# Altium PCB PCB.PcbDoc (part 4 of 5)
Units mil, origin at the board's own origin, x right, y up, seen from the top; angles counter-clockwise.
Board outline 7500 x 6500 mil, 2 copper layers (Top Layer, Bottom Layer); 229 components, 273 nets, 1476 pads, 506 vias.
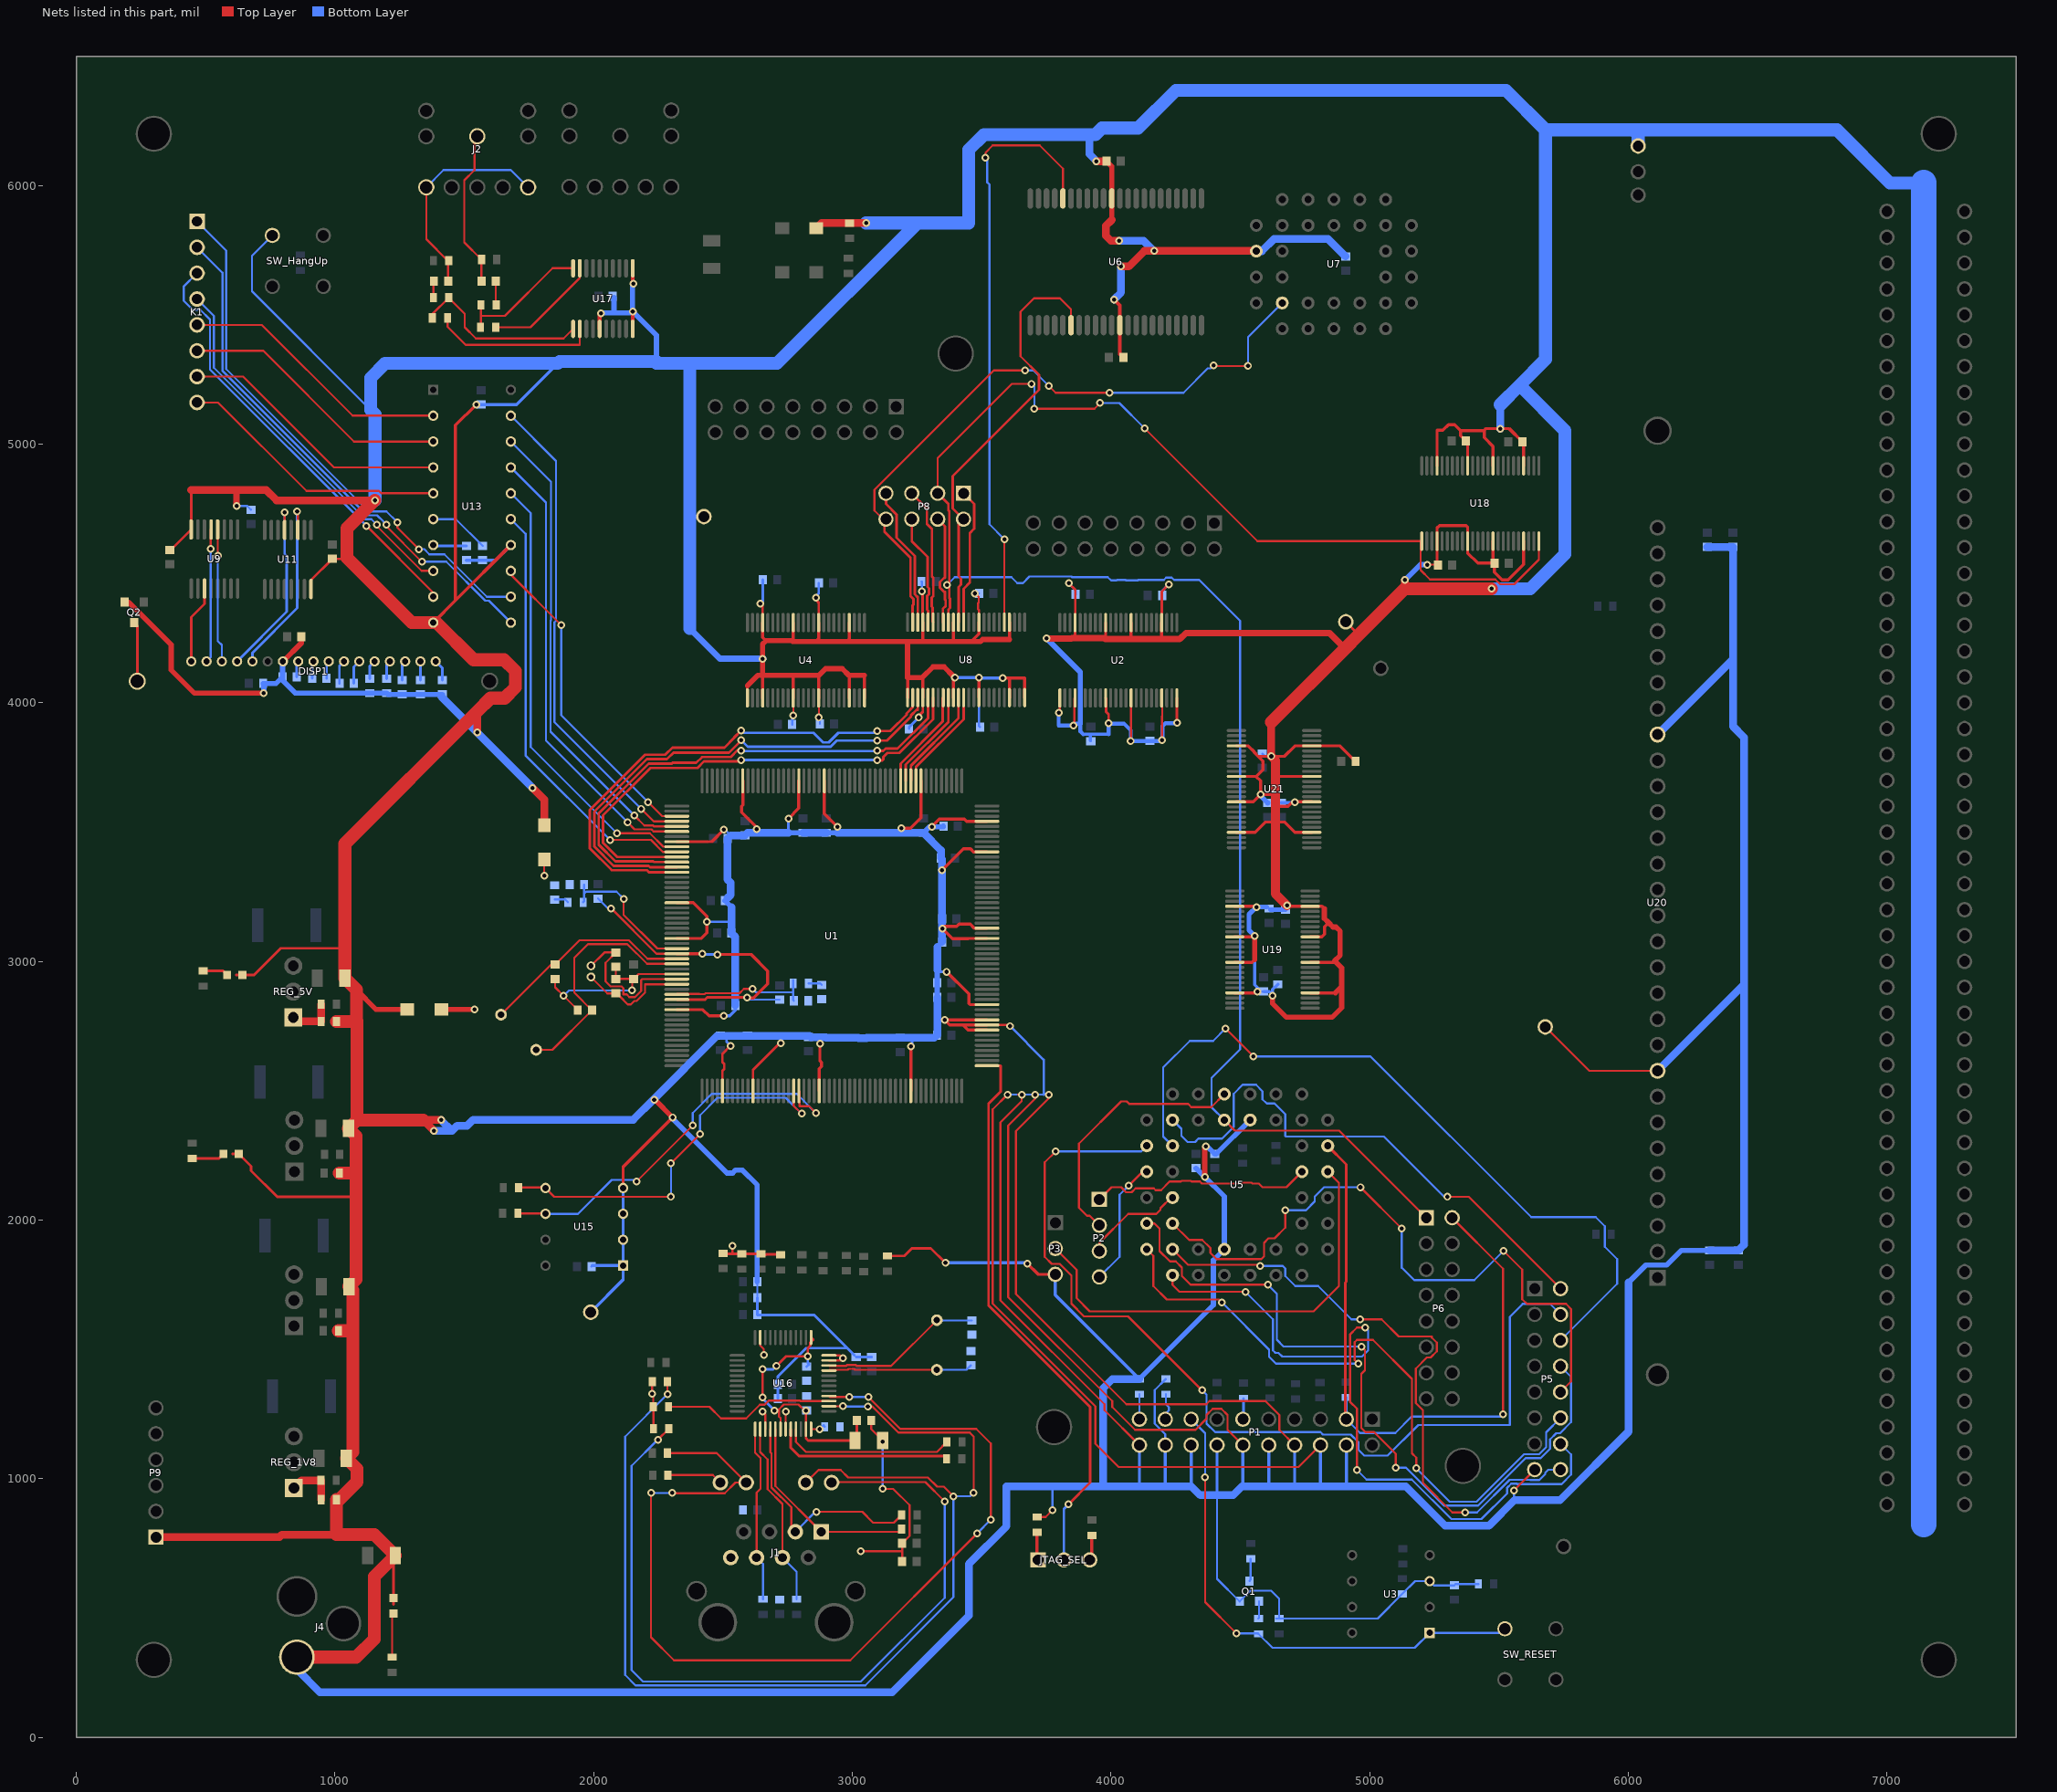
[diagram p4: the nets of this part, all layers, seen from the top]

## Via types
v1: diameter 30, hole 16, Top Layer to Bottom Layer, 500 vias
v2: diameter 30, hole 16, Top Layer to Bottom Layer, tented top, 6 vias

## Nets (pads, with @x,y where several pads share a name; then routed paths per layer and width w, separated by ;. In a path a pad name is that pad's centre, name@x,y a point inside that pad or via, vN(x,y) a via of type N, cw(c..) or ccw(c..) an arc to the next point about the centre after c; other vN are vias at no path point) (continued)
GND: C1.2 C2.2 C3.2 C4.2 C5.1 C6.2 C7.1 C8.2 C9.1 C10.2 C11.1 C12.2 C13.1 C14.2 C16.2 C18.2 C20.2 C21.2 C24.2 C25.2 C32.2 C33.2 C34.2 C35.2 C36.2 C37.2 C38.2 C39.2 C41.2 C43.2 C44.1 C45.1 C46.1 C47.1 C48.1 C49.2 C50.2 C51.2 C52.2 C53.2 C54.2 C55.2 C56.2 C57.2 C58.2 C59.2 C60.2 C61.2 C63.2 C65.2 C66.2 C67.2 C68.2 C69.2 C70.2 C71.1 C72.1 C74.1 C75.2 C76.1 C77.2 C78.1 C79.1 C80.2 C81.2 C82.2 C83.2 C84.2 C85.2 C86.2 C87.2 C88.2 C89.2 C90.2 C91.2 C92.2 C93.2 C94.2 C95.2 C96.2 C97.2 C98.2 C99.2 C100.2 C101.2 C102.2 C103.2 C104.2 C105.2 C106.2 C107.2 DISP1.11 J1.8 J4.GND L2.2 L3.2 L4.2 L5.K L6.K L7.K P1.4 P1.6 P1.8 P1.10 P1.12 P1.14 P1.16 P1.18 P1.20 P3.3 P5.15 P9.1 pad.GND_TEST_1 pad.GND_TEST_2 pad.GND_TEST_3 pad.GND_TEST_4 pad.GND_TEST_5 Q1.2 Q2.S R4.1 R6.2 R13.2 R14.2 R19.1 R20.1 R21.1 R35.2 R36.1 R37.1 R38.1 R39.2 R40.2 R48.1 R50.1 R52.1 R54.1 R64.1 R65.2 R66.2 SW_HangUp.2 U1.8 U1.20 U1.27 U1.41 U1.57 U1.63 U1.76 U1.94 U1.112 U1.113 U1.114 U1.117 U1.130 U1.132 U1.147 U1.153 U1.165 U1.184 U1.189 U1.200 U2.4 U2.10 U2.15 U2.21 U2.25 U2.28 U2.34 U2.39 U2.45 U2.48 U3.3 U4.4 U4.10 U4.15 U4.21 U4.25 U4.28 U4.34 U4.39 U4.45 U4.48 U5.1 U5.23 U6.12 U6.34 U7.16 U8.4 U8.10 U8.15 U8.21 U8.25 U8.28 U8.34 U8.39 U8.45 U8.48 U9.8 U11.8 U13.10 U13.14 U15.1 U15.2 U15.3 U15.4 U16.15 U16.19 U16.35 U16.36 U16.47 U17.1 U17.15 U17.20 U18.4 U18.10 U18.15 U18.21 U18.28 U18.34 U18.39 U18.45 U19.4 U19.10 U19.15 U19.21 U19.28 U19.34 U19.39 U19.45 U20.9 U20.22 U21.4 U21.10 U21.15 U21.21 U21.28 U21.34 U21.39 U21.45 | length 91126.1
  Top Layer w8: C10.2@362,4590.56 C10.2@364.82,4590.56 ; U11.8@907.57,4439.83 U11.8@907.57,4474.01 ; 1068,1572 1069,1573 ; 1078,2182 1082,2186 ; U15.4@2114,2124 U15.4@2115,2123 ; R20.1@2226.47,1376 v1(2226.47,1328.53) 2230.47,1324.53 R19.1@2230.47,1278 2231.47,1277 R21.1@2231.47,1193 ; R39.2@2501,1871.53 R39.2@2503,1869.53 ; v1@2529,2674 v1(2530,2674) ; U16.47@2643.89,1546 2643.89,1515.11 2658,1501 v1(2658,1479) ; v1(2644,4384) v1@2653.47,4374.53 ; R37.1@2647,1869.53 R37.1@2651,1865.53 ; v2(2653,1260) 2663.57,1249.43 U16.15@2663.57,1191.67 ; v1@2653,4171 v1(2653.47,4170.54) ; 2665.29,1865.53 2667.76,1868 ; v1@2719,2684 v1(2724,2684) ; R36.1@2720.53,1868 R36.1@2723,1865.53 ; U16.19@2742.31,1191.67 2742.31,1257.31 v2(2744,1259) ; 2770,4237 2771.58,4238.58 ; U4.34@2771.58,4018.66 2772,4018.24 v1(2772,3951) ; 2771.58,4105.58 2772,4106 ; U4.39@2870,4018.66 2871,4017.66 v1(2871,3943) ; 2870,4105 2871,4106 ; v1@2874.75,2680.75 v1(2876,2682) ; U16.35@2909.64,1457.42 2954.42,1457.42 v1(2963,1466) 2951.9,1477.1 U16.36@2909.64,1477.1 ; 2987,4106 2988.11,4104.89 ; v1(3032,720) 3192.97,720 ; 3047,4106 3047.17,4105.84 ; C63.2@3073.12,1226 3073.12,1192.03 C61.2@3117.15,1148 v1(3117.15,1142.85) ; v1@3114.75,958.45 v1(3117.15,960.85) 3158.15,960.85 3221.34,897.66 3221.34,778.37 C81.2@3192.97,750 3192.97,720 ; C86.2@3192.97,680 3192.97,720 ; 3213.78,4235.78 3215,4237 ; v1(3257,3943) v1@3257,3949 ; v1(3269,4431) v1@3272.22,4427.78 ; 3272,4237 3272.84,4237.84 ; v1(3308,3520) v1@3308,3522 ; v1@3390.95,4090.95 v1(3397,4097) v1@3391.11,4102.89 ; U8.15@3390.95,4311.34 U8.15@3393.44,4313.83 ; v1(3474,4423) 3488.43,4408.57 3488.43,4387.06 3486.35,4384.99 3486.35,4361.79 3489.37,4358.78 U8.10@3489.37,4311.34 ; U8.39@3489.37,4020 U8.39@3490,4020.63 ; v1(3600,2485) 3543,2428 3543,1677.16 3940,1280.16 3940,1135 4030,1045 4725,1045 P1.6@4810,1130 ; v1@3605.67,2754.33 v1(3610,2750) ; 3607,4096 3607.48,4095.52 ; v1@3641,2485 v1(3655,2485) 3655,2459.87 3573,2377.87 3573,1689.59 3975,1287.59 3975,1265 P1.20@4110,1130 ; 3666,4096 3666.54,4095.47 ; v1(3707,2485) 3707,2469.44 3603,2365.44 3603,1702.02 4005,1300.02 4005,1277.69 4093.21,1189.47 4326.79,1189.47 4369.47,1232.16 4369.47,1246.79 4393.21,1270.53 4426.79,1270.53 4450.53,1246.79 4450.53,1189.47 P1.12@4510,1130 ; R6.2@3714,852 3747,852 v1(3774,879) ; v1(3759,2485) 3759,2470 3633,2344 3633,1714.44 4059.44,1288 4368.26,1288 4380.79,1300.53 4596.79,1300.53 4650.53,1246.79 4650.53,1189.47 P1.8@4710,1130 ; v1(3798,3961) v1@3802.21,3965.21 ; v1(3855,3912) 3858.48,3915.48 3858.48,4015.88 U2.28@3861.26,4018.66 ; 3978,4246 3979.37,4247.37 ; v1(4076.44,3852.44) 4077.8,3853.8 U2.39@4077.8,4018.66 ; 4077.8,4246.21 4078,4246 ; U2.45@4195.91,4018.66 4198,4016.57 4198,3948.02 4197,3947.02 4197,3856 v1(4198,3855) ; v1@4254.96,3923.96 4255.92,3923 v1(4255,3923) ; 4550.78,3714.78 4551.21,3715.21 ; v1@4552,3095 v1(4556,3099) ; v1@4552.67,3210.33 4553,3210 v1(4562,3210) ; v1@4561.03,2878.47 v1(4566,2883.44) ; v1@4573,3646 v1(4578,3646) ; P1.10@4610,1130 P1.10@4610,1142 ; v1(4681,3216) v1@4683,3214 ; v1@4700.58,3615.58 v1(4710.43,3615.58) v1@4713.21,3612.8 ; v1(5223,4534) 5259.82,4534 5260.63,4534.81 C100.2@5263.44,4532 ; C50.2@5371.56,5012 C50.2@5378.74,5004.82 ; C14.2@5477.17,4545.27 C14.2@5482.44,4540 ; v1(5558,955) P5.15@5638,1035 ; C99.2@5590.56,5009 C99.2@5595.28,5004.28 ; pad.GND_TEST_3@5679,2747 5849,2577 U20.9@6113,2577
  Top Layer w10: C10.2@364.82,4590.56 U9.8@444.43,4670.17 ; L7.K@628,2256 676,2208 676,2191 777,2090 1082,2090 ; L6.K@642.06,2948 687,2948 790,3051 1038.15,3051 ; U11.8@907.57,4474.01 C16.2@990,4556.44 1041.44,4556.44 1046,4561 ; v1@1154.53,4783 v1(1155,4783) ; L5.K@1226,538 1226,695.85 C71.1@1233.15,703 ; U1.57@2497.95,2499.41 2497.95,2576.65 2505,2583.69 2505,2603.77 2497.95,2610.82 2497.95,2642.95 v1@2529,2674 ; R39.2@2503,1869.53 2537,1869.53 ; v1(2537,1900) 2537,1869.53 ; U4.25@2594.41,4018.66 2594.41,4065.58 ; U1.63@2616.06,2499.41 2616.06,2581.06 v1@2719,2684 ; v1(2631,3511) v1@2631,3517.94 ; R37.1@2647,1869.53 R38.1@2573,1869.53 2537,1869.53 ; R37.1@2651,1865.53 2665.29,1865.53 ; U4.21@2653.47,4310 v1@2653.47,4374.53 ; 2667.76,1868 R36.1@2720.53,1868 ; v1(2860,4406) 2860,4397 2870,4387 U4.10@2870,4310 ; R35.2@3136,1861.53 3201,1861.53 3230.47,1891 3304,1891 v1(3360,1835) ; v1@3257,3949 3272.84,3964.84 U8.28@3272.84,4020 ; v1@3272.22,4427.78 3272.22,4344.73 3272.84,4344.11 U8.21@3272.84,4311.34 ; U1.113@3520.59,2754.33 v1@3605.67,2754.33 ; v1@3802.21,3965.21 U2.25@3802.21,4018.66 ; v1(3837,4462) 3862,4437 3862,4310.74 U2.21@3861.26,4310 ; 3847.18,4249 3848.18,4250 3861.26,4263.08 ; U2.34@3979.37,4018.66 3981,4017.03 3981,3965 3991,3955 v1(3991,3921) ; U2.4@4195.91,4310 4195.91,4429.91 v1(4224,4458) ; v1@4254.96,3923.96 U2.48@4254.96,4018.66 ; pad.GND_TEST_2@4908,4313 4957.5,4263.5 4957.5,4262.5 ; 5441.37,5052 5443,5053.63
  Top Layer w12: U9.8@444.43,4670.17 444.43,4823 ; U13.10@1380,4310 1466,4396 ; v1(1546.44,5153.44) 1466,5073 1466,4396 ; U13.14@1680,4610 1466,4396 ; U15.4@2114,2124 2114,2206 v1(2305,2397) ; U1.41@2321.77,2813.39 2422.61,2813.39 2446,2790 v1(2503,2790) ; U1.27@2321.77,3088.98 2416.57,3088.98 2438,3110.4 v1(2438,3153) 2438,3174 2385.23,3226.77 U1.20@2321.77,3226.77 ; U1.8@2321.77,3462.99 2456.99,3462.99 v1(2503,3509) ; U1.200@2576.69,3698.23 2576.69,3604.87 2571.98,3600.15 2571.98,3576.96 v1@2631,3517.94 ; U4.28@2653.47,4018.66 2653.47,4106 ; U4.21@2653.47,4310 2653.47,4252.53 2666,4240 ; v1(2753,3552) 2793.23,3592.23 U1.189@2793.23,3698.23 ; U4.34@2771.58,4018.66 2771.58,4105.58 ; 2771.58,4238.58 U4.15@2771.58,4310 ; 2858,4237 2870,4249 U4.10@2870,4310 ; U4.39@2870,4018.66 2870,4105 ; U1.76@2871.97,2499.41 2871.97,2584.64 2881,2593.66 2881,2609.77 2874.75,2616.02 v1@2874.75,2680.75 ; U1.184@2891.65,3698.23 2891.65,3571.35 v1(2942,3521) ; 2977,4237 2988.11,4248.11 U4.4@2988.11,4310 ; U4.45@2988.11,4018.66 2988.11,4104.89 ; U4.48@3047.17,4018.66 3047.17,4105.84 ; v1(3190,3515) 3225,3515 3265.67,3555.67 U1.165@3265.67,3698.23 ; U8.25@3213.78,4020 3213.78,4097 ; U1.94@3226.3,2499.41 v1(3226.3,2671.3) ; 3269.78,4097 3272.84,4100.06 U8.28@3272.84,4020 ; 3272.84,4237.84 U8.21@3272.84,4311.34 ; v1@3308,3522 3336.05,3550.05 3433.95,3550.05 3442.27,3541.73 U1.153@3520.59,3541.73 ; v1(3346,3352) 3429,3435 3457,3435 3468.38,3423.62 U1.147@3520.59,3423.62 ; v1(3365,2960) 3451,2874 3451,2837.26 3455.19,2833.07 U1.117@3520.59,2833.07 ; 3387,4237 3390.95,4240.95 U8.15@3390.95,4311.34 ; U8.34@3390.95,4020 v1@3390.95,4090.95 ; 3459,4237 3489.37,4267.37 U8.10@3489.37,4311.34 ; U8.39@3490,4020.63 v1(3490,4097) ; U1.112@3520.59,2734.65 3447.35,2734.65 3427.67,2754.33 ; U1.113@3520.59,2754.33 3427.67,2754.33 ; U1.114@3520.59,2774.02 v1(3357.02,2774.02) 3376.7,2754.33 3427.67,2754.33 ; U1.130@3520.59,3088.98 3448.99,3088.98 3448.01,3088 3387,3088 v1(3348,3127) 3356,3135 3404,3135 3413,3144 3455.56,3144 3471.22,3128.35 U1.132@3520.59,3128.35 ; v1(3582,4096) 3607,4096 3666,4096 ; U8.45@3607.48,4020 3607.48,4095.52 ; 3607.48,4245 U8.4@3607.48,4311.34 ; U8.48@3666.54,4020 3666.54,4095.47 ; v1(3677,1832) 3719,1790 P3.3@3785,1790 ; 3861.26,4263.08 U2.21@3861.26,4310 ; 3979.37,4247.37 U2.15@3979.37,4310 ; 4077.8,4246.21 U2.10@4077.8,4310 ; U2.4@4195.91,4310 4195.91,4293.41 4196,4293.32 4196,4246 ; v1@4362.44,2281.44 v1(4366,2285) ; U19.45@4478.66,2878.47 v1@4561.03,2878.47 ; U19.39@4478.66,2996.58 4545.58,2996.58 4556,3007 ; U19.34@4478.66,3095 v1@4552,3095 ; U19.28@4478.66,3213.11 4558.89,3213.11 v1(4562,3210) ; U21.45@4485,3498.78 4557.78,3498.78 4598,3539 4636,3539 4670,3539 4710.22,3498.78 U21.4@4776.34,3498.78 ; U21.39@4485,3616.89 4485.11,3616.78 4550,3616.78 4550,3618 v1(4578,3646) ; U21.34@4485,3715.32 4485.11,3715.21 4551.21,3715.21 4560.98,3715.21 ; U21.28@4485,3833.43 4530.88,3833.43 4553,3811.3 4553,3809 4569.11,3792.89 ; 4636,3600 4685,3600 v1@4700.58,3615.58 ; 4636,3647 4635,3646 v1(4578,3646) ; 4636,3716 4636.68,3715.32 U21.15@4776.34,3715.32 ; v1@4683,3214 4683.89,3213.11 U19.21@4770,3213.11 4815.89,3213.11 4825,3204 ; v1(4710.43,3615.58) 4711.74,3616.89 U21.10@4776.34,3616.89 ; U19.4@4770,2878.47 4867.47,2878.47 ; U19.10@4770,2996.58 4858.58,2996.58 4864.5,3002.5 ; U19.15@4770,3095 4815,3095 4826,3106 4826,3134 4841.5,3149.5 ; C104.2@4945.56,3773 4885.13,3833.43 U21.21@4776.34,3833.43 4710.43,3833.43 4670,3793 v1(4620,3793) 4619.89,3792.89 4569.11,3792.89 ; C100.2@5260.63,4534.81 U18.28@5260.63,4625 5260.63,4676.63 5269.63,4685.63 5373.37,4685.63 5378.74,4680.26 U18.34@5378.74,4625 5378.74,4579.5 5418.24,4540 C14.2@5482.44,4540 5482.44,4504.51 5511.95,4475 5535.6,4475 5595.28,4534.68 U18.45@5595.28,4625 ; U18.21@5260.63,4916.34 5260.63,5053.63 5283.03,5053.63 5304.84,5075.44 5328.04,5075.44 5351.48,5052 ; C50.2@5371.56,5012 5351.48,5032.08 5351.48,5052 ; U18.15@5378.74,4916.34 C50.2@5378.74,5004.82 ; 5441.37,5052 5351.48,5052 ; C14.2@5477.17,4545.27 U18.39@5477.17,4625 ; U18.10@5477.17,4916.34 5477.17,4991.24 5443,5025.4 5443,5053.63 5449.37,5060 v1(5505,5060) 5539.56,5060 C99.2@5590.56,5009 ; U18.4@5595.28,4916.34 C99.2@5595.28,5004.28 ; 4560.98,3715.21 4578,3698.18 v1(4578,3646) ; 4560.98,3715.21 4587,3741.23 4587,3775 4569.11,3792.89
  Top Layer w15: U17.15@2023.18,5445.75 2023.18,5500.18 v1(2028,5505) ; U17.20@2151.13,5445.75 v1(2151.13,5512.87) ; v1@2151.13,5623.87 U17.1@2151.13,5680 ; 3974,4250 3978,4246 ; v1(4012,5559) 4034.5,5536.5 U6.12@4034.5,5460 4034.5,5348.06 C24.2@4047.56,5335
  Top Layer w20: Q2.S@186.6,4388.74 202.77,4388.74 367,4224.51 367,4127 457,4037 v1(725,4037) ; DISP1.11@798.94,4160 870.56,4231.62 C79.1@870.56,4256 ; 1083,2890.15 1158.15,2815 L4.2@1279.06,2815 ; v1@2151.13,5623.87 v1(2154,5621) ; v1(2234.07,2465) 2237,2465 v1(2305,2397) ; 2594.41,4065.58 2634.83,4106 2653.47,4106 ; v1@2653,4171 2653,4227 2666,4240 2767,4240 2770,4237 2858,4237 2977,4237 3212.56,4237 3213.78,4235.78 3213.78,4097 3269.78,4097 ; v1(2653.47,4170.54) 2653.47,4106 ; 3047,4106 2987,4106 2961,4132 2897,4132 2871,4106 2772,4106 2653.47,4106 ; 3215,4237 3272,4237 3387,4237 3459,4237 3496,4237 3504,4245 3607.48,4245 ; 3272.84,4100.06 3311.78,4139 3355,4139 v1@3391.11,4102.89 ; C3.2@3982.44,6094 4003,6073.44 U6.34@4003,5950.08 4003,5867 ; v1(4362.44,2167) v1@4362.44,2281.44 ; U7.16@4551,5747 4556,5752 U7.16@4562,5746 ; 4556,3007 v1(4556,3099) ; v1(4625,2867) 4625,2837 4678,2784 4855,2784 4892,2821 4892,2903 ; 4825,3204 4825,3166 4841.5,3149.5 4858,3133 4869.6,3133 4886,3116.6 4886,3024 4864.5,3002.5 4892,2975 4892,2903 ; 4867.47,2878.47 4892,2903 ; 5137,4442 5138,4441
  Top Layer w25: v1(620,4761) 620,4821 622,4823 ; v1(3751,4249) 3847.18,4249 ; 3848.18,4250 3974,4250 ; 3978,4246 4078,4246 4196,4246 4266,4246 4290,4270 4845,4270 4905,4210
  Top Layer w30: P9.1@308,774 785.3,774 794.77,783.47 1005.53,783.47 ; 444.43,4823 622,4823 734.23,4823 774.23,4783 v1@1154.53,4783 ; R48.1@1005.53,919 R48.1@1016,919 ; C78.1@1054.15,1743 C78.1@1069,1728.15 ; U13.10@1380,4310 U13.10@1392,4310 ; v1(1383,2345) 1341.15,2386.85 v1(1410.48,2386.85) ; v1(1549.5,3885.5) 1549.5,3966.5 ; v1(1764,3671) 1809,3626 L3.2@1809,3525.94 ; L2.2@2860.94,5835 2880.47,5854.53 R64.1@2990,5854.53 3052.53,5854.53 v1(3053,5855) ; v1(3944,6094) C3.2@3982.44,6094 ; 4003,5867 3980,5844 3980,5806 4000,5786 v1(4031,5786) ; v1(4039,5687) 4069.18,5687 4129.18,5747 v1(4167,5747) U7.16@4551,5747 ; v1(4620,3793) 4620,3925 ; 5137,4442 v1(5137,4475)
  Top Layer w35: v1(4620,3793) 4636,3777 4636,3716 4636,3647 4636,3600 4636,3539 4636,3261 v1(4681,3216)
  Top Layer w50: J4.GND@853,310 1082,310 1151.68,379.68 1151.68,621.53 C71.1@1226,695.85 ; R48.1@1005.53,919 1005.53,783.47 1152.68,783.47 C71.1@1233.15,703 ; R50.1@1005.53,2768 1083,2768 1083,2890.15 C74.1@1038.15,2935 1038.15,3051 1038.15,3455.15 1549.5,3966.5 1601.23,4018.23 1656.23,4018.23 1697,4059 1697,4123 1654,4166 1536,4166 U13.10@1392,4310 ; R54.1@1013.53,1572 1068,1572 ; R48.1@1016,919 1085,988 1085,1038.15 C72.1@1044.15,1079 1069,1103.85 1069,1573 C78.1@1069,1728.15 ; R52.1@1017.53,2182 1078,2182 ; C78.1@1054.15,1743 1082,1770.85 1082,2090 1082,2186 1082,2324.15 C76.1@1052.15,2354 1085,2386.85 ; 1085,2770 1085,2386.85 ; v1@1154.53,4783 1046,4674.47 1046,4561 1297,4310 U13.10@1380,4310 ; 1341.15,2386.85 1085,2386.85 ; 4620,3925 4905,4210 4957.5,4262.5 5137,4442 ; 5138,4441 v1(5471,4441)
  Bottom Layer w8: C54.2@660.56,4761 C54.2@675,4746.56 ; SW_HangUp.2@758.15,5806.85 679,5727.7 679,5591 1138,5132 ; C2.2@1991.56,1820 C2.2@1995.56,1824 ; v1(2028,5505) v1@2030,5507 ; C1.2@2073.56,5572 C1.2@2079,5566.56 ; v1@2150,5507 2150,5514 v1(2151.13,5512.87) ; v1(2438,3153) 2532.56,3153 ; v1(2503,3509) 2508.44,3509 2530,3487.44 C68.2@2517.56,3475 ; C88.2@2632.56,1700 C91.2@2632.56,1762 ; v1(2644,4384) 2647,4384 v1@2654.44,4391.44 ; v1(2653.47,4170.54) 2654,4170 2654,4170.44 v1@2653.47,4170.98 ; v1(2724,2684) 2724,2689 2727,2692 2727,2712.56 ; 2753,3498.44 2754,3497.44 ; C55.2@2767.56,3916 2767.56,3946.56 v1(2772,3951) ; v1(2871,3943) 2874.44,3939.56 C35.2@2874.44,3919 ; 2875,2707.56 2876,2706.56 v1(2876,2682) ; 2942,3497.44 v1(2942,3521) ; v1(3117.15,960.85) v1(3117.15,1142.85) ; v1(3190,3515) 3190,3511.44 3204,3497.44 ; C6.2@3219.44,3899 C6.2@3219.44,3905.44 ; v1(3226.3,2671.3) v1@3231,2676 ; C94.2@3267.44,4469 C94.2@3269,4467.44 ; 3328.44,2776 3330.43,2774.02 v1(3357.02,2774.02) ; 3328.44,2966 3334.44,2960 ; v1(3474,4423) C80.2@3490,4423 ; v1@3491,4096 v1(3490,4097) 3490,3910.44 C95.2@3494.44,3906 ; v1(3600,2485) v1(3655,2485) v1(3707,2485) 3740,2485 3743,2488 3759,2488 v1(3759,2485) ; v1@3674,1835 v1(3677,1832) ; v1(3774,879) 3774,970 3775,971 ; v1(3855,3912) v1@3862.56,3919.56 ; C97.2@3863.44,4419 C97.2@3863.44,4435.56 ; C38.2@3921,3852.88 C38.2@3922,3851.88 ; v1@3991,3919.56 v1(3991,3921) ; 4109,971 4110,972 ; v1@4195.44,3852.44 v1(4198,3855) v1@4199.56,3856.56 ; C96.2@4197.56,4415 C96.2@4197.56,4431.56 ; P1.18@4210,1130 4210,1172.69 4169.47,1213.21 4169.47,1343 R13.2@4212,1385.53 ; v1@4255,3921 v1(4255,3923) ; C56.2@4401,2255.56 C56.2@4406.56,2255.56 ; 4410,936 4410,613.23 Q1.2@4497.6,525.63 4538.97,567 4619,567 4650,536 R66.2@4650,459.53 ; 4507,971 4510,974 ; v1(4566,2883.44) C106.2@4590,2883.44 ; v1@4578,3641 v1(4578,3646) ; C103.2@4585,3803.56 4595.56,3793 v1(4620,3793) ; C105.2@4602.56,3210 4604.56,3212 C105.2@4612,3204.56 C105.2@4616.56,3200 ; 4607,971 4610,974 ; R66.2@4637.53,459.53 R66.2@4650,459.53 ; C33.2@4663,3212 C33.2@4675,3200 4681,3206 v1(4681,3216) ; v1@4708.41,3613.56 v1(4710.43,3615.58) ; 4709,971 4710,972 ; 4908,971 4910,973 ; R65.2@5420.47,593 5332.44,593 C32.2@5327,587.56 5248.44,587.56 U3.3@5232,604 5175.53,604 R4.1@5126,554.47 5031.06,459.53 R66.2@4650,459.53 ; v1(5558,955) 5558,921 5561,918
  Bottom Layer w10: v1(620,4761) C54.2@660.56,4761 ; DISP1.11@797.44,4158.5 DISP1.11@798.94,4160 ; 2373,4720 pad.GND_TEST_1@2426,4720 ; 2514,2712.56 2514,2690 v1(2530,2674) ; v1(2631,3511) v1@2635,3507 ; C87.2@2632.56,1632.44 2852.56,1632.44 2980,1505 ; C87.2@2632.56,1635 C88.2@2632.56,1700 ; v1@2654.44,4391.44 C20.2@2654.44,4476 ; C90.2@2712.44,1310 C89.2@2712.44,1365 2712.44,1395.62 2821.82,1505 2980,1505 ; 2753,3498.44 v1(2753,3552) ; v1(2860,4406) 2860,4413 2870.44,4423.44 C58.2@2870.44,4463 ; C93.2@3007.9,1477.1 2980,1505 ; C93.2@3015,1470 C92.2@3075,1470 ; C6.2@3219.44,3905.44 v1(3257,3943) ; v1@3231,2676 3231,2705 ; v1(3269,4431) C94.2@3269,4467.44 ; 3334.44,2960 v1(3365,2960) ; v1(3610,2750) 3740,2620 3740,2485 ; v1(3837,4462) C97.2@3863.44,4435.56 ; C96.2@4197.56,4431.56 v1(4224,4458)
  Bottom Layer w12: C41.2@1508,4551.44 C43.2@1571,4551.44 1621.44,4551.44 U13.14@1680,4610 ; v1(1546.44,5153.44) C21.2@1566,5153.44 1702.44,5153.44 1861,5312 1869,5320 ; pad.GND_TEST_4@1989,1644 2114,1769 U15.1@2114,1824 ; C2.2@1995.56,1824 U15.1@2114,1824 ; U15.4@2114,2124 U15.3@2114,2024 U15.2@2114,1924 U15.1@2114,1824 ; v1(2503,2790) 2526,2790 2547.56,2811.56 C67.2@2547.56,2830 ; v1(3360,1835) v1@3674,1835 ; v1(3397,4097) v1(3490,4097) ; v1@3491,4096 v1(3582,4096) ; P3.3@3785,1790 3785,1710.53 R14.2@4110,1385.53 ; 3893,3878 3921,3878 ; C38.2@3921,3852.88 3921,3878 ; 3991,3878 3921,3878 ; 4110,972 P1.20@4110,1130 ; 4210,971 P1.18@4210,1130 ; 4310,971 P1.16@4310,1130 ; 4410,936 P1.14@4410,1130 ; 4510,974 P1.12@4510,1130 ; v1(4556,3099) 4556,2909 4566,2899 v1(4566,2883.44) ; C106.2@4590,2883.44 4612.56,2883.44 v1@4625,2871 ; 4610,974 P1.10@4610,1130 ; v1(4625,2867) v1@4625,2871 ; C107.2@4645,2911.44 4625,2891.44 v1@4625,2871 ; C18.2@4658,3613.56 v1@4708.41,3613.56 ; 4710,972 P1.8@4710,1130 ; 4810,971 P1.6@4810,1130 ; 4910,973 P1.4@4910,1130
  Bottom Layer w15: v1(3798,3961) 3798,3912 v1(3855,3912) ; v1@3862.56,3919.56 3881.44,3919.56 3881.44,3889.56 3893,3878 ; 3991,3878 v1@3991,3916 ; v1@3991,3919.56 4050.44,3919.56 4076.44,3893.56 v1(4076.44,3852.44) C98.2@4150,3852.44 v1@4195.44,3852.44 ; v1@4199.56,3856.56 4199.56,3909.56 4211,3921 v1@4255,3921
  Bottom Layer w18: v1(4556,3099) 4534,3121 4534,3182 v1(4562,3210) C105.2@4602.56,3210 ; C105.2@4616.56,3200 C33.2@4675,3200
  Bottom Layer w20: v1(725,4037) 725,4072.56 C53.2@722.56,4075 772.44,4075 C39.2@797.44,4100 ; DISP1.11@797.44,4158.5 C39.2@797.44,4100 ; C44.1@1415,4020 C44.1@1415,4032.44 C45.1@1330,4032.44 C46.1@1260,4032.44 1205,4032.44 C47.1@1200,4037.44 C48.1@1135,4037.44 846.56,4037.44 797.44,4086.56 C39.2@797.44,4100 ; v1@2030,5507 2079,5507 ; C1.2@2079,5566.56 2079,5507 ; v1@2150,5507 2079,5507 ; v1@2150,5514 2150,5617 v1(2154,5621) ; v1(2151.13,5512.87) 2243,5421 2243,5320 ; v1@2229,2470 2232,2467 2234,2465 v1(2234.07,2465) ; v1(2305,2397) 2305,2392.75 2515.75,2182 2537.75,2182 2548.75,2193 2575.25,2193 2632.56,2135.7 C91.2@2632.56,1762 ; C51.2@2477.56,2712.56 C51.2@2490,2712.56 ; C5.1@2517.56,3245 C5.1@2507.56,3235 2532.56,3210 ; C69.2@2585,3487.44 C69.2@2595,3497.44 ; 2754,3497.44 C9.1@2810,3497.44 ; C70.2@2900,3497.44 2942,3497.44 ; C49.2@3275,3497.44 3297.37,3519.81 3352.44,3519.81 C7.1@3352.44,3523 ; C34.2@3317.44,2705 C34.2@3327.44,2715 C34.2@3328.44,2716 ; C11.1@3328.44,2861 C37.2@3328.44,2917 3328.44,2966 ; 3328.44,3056 C4.2@3347.44,3075 ; C8.2@3342.44,3400 C8.2@3347.44,3395 ; v1(3751,4249) 3881.44,4118.56 3881.44,3919.56 ; R14.2@4110,1385.53 4396,1671.53 4396,1845 U5.1@4438,1887 4438,2091.44 v1(4362.44,2167) C57.2@4329,2200.44 ; v1@4166,5747 v1(4167,5747) ; v1(4366,2285) 4371.56,2285 C56.2@4401,2255.56 ; C56.2@4406.56,2255.56 U5.23@4538,2387 ; v1@4578,3641 C102.2@4606,3613 ; v1(5137,4475) 5196,4534 v1(5223,4534) ; 6001,1759 6068,1826 6148.37,1826 6204.93,1882.56 C84.2@6315,1882.56
  Bottom Layer w25: 2372,4287 2488.46,4170.54 v1(2653.47,4170.54)
  Bottom Layer w30: J4.GND@853,310 853,263 941,175 3155,175 3450,470 3450,670 3596,816 3596,971 3775,971 3970,971 ; v1(1383,2345) 1452.33,2345 ; v1(1410.48,2386.85) 1452.33,2345 ; C44.1@1415,4020 v1(1549.5,3885.5) v1(1764,3671) ; C51.2@2477.56,2712.56 2232,2467 2152.99,2387.99 1534.31,2387.99 1511.33,2365 1472.33,2365 1452.33,2345 ; C51.2@2490,2712.56 2514,2712.56 C13.1@2595,2712.56 2727,2712.56 2835,2712.56 2840,2707.56 2875,2707.56 2899,2707.56 ; C5.1@2517.56,3245 2530,3257.44 2530,3304.33 2517.56,3316.77 C68.2@2517.56,3475 ; C68.2@2530,3487.44 C69.2@2585,3487.44 ; 2532.56,3155.71 2532.56,3153 C52.2@2532.56,3110 2547.56,3095 C67.2@2547.56,2830 ; 2532.56,3156.68 2532.56,3210 ; C69.2@2595,3497.44 2754,3497.44 ; v1@2653.22,4170.78 v1(2653.47,4170.54) v1@2653.47,4170.98 ; C9.1@2810,3497.44 C70.2@2900,3497.44 ; 2899,2705 3023.67,2705 3024.67,2704 3055.33,2704 3056.33,2705 C25.2@3185,2705 3231,2705 C34.2@3317.44,2705 ; 2942,3497.44 3204,3497.44 C49.2@3275,3497.44 3342.44,3430 C8.2@3342.44,3400 ; C34.2@3328.44,2716 3328.44,2776 C11.1@3328.44,2861 ; 3328.44,2966 3328.44,3056 ; C4.2@3347.44,3075 C36.2@3347.44,3165 C8.2@3347.44,3395 ; 3916,6197 3916,6122 v1(3944,6094) ; v1(4012,5559) 4039,5586 v1(4039,5687) ; v1(4031,5786) 4127,5786 v1@4166,5747 ; R14.2@4110,1385.53 4005.53,1385.53 3970,1350 3970,971 ; U7.16@4562,5746 4583,5746 4630,5793 4840,5793 C12.2@4907,5726 ; v1(5505,5060) 5505,5153 ; 6001,1759 6001,1182 5737,918 5561,918 5461,818 5292,818 5139,971 4908,971 4810,971 4709,971 4607,971 4507,971 4472,936 4410,936 4345,936 4310,971 4210,971 4109,971 3970,971 ; U20.9@6113,2577 6447,2911 ; U20.22@6113,3877 6405,4169 ; C83.2@6305,4602.44 C75.2@6405,4602.44 6405,4169 ; C84.2@6315,1882.56 C77.2@6425,1882.56 6447,1904.56 6447,2911 ; 6405,4169 6405,3908.33 6447,3866.33 6447,2911
  Bottom Layer w50: v1(1155,4783) 1155,5115 1138,5132 1138,5256.33 1193.67,5312 1861,5312 ; 1869,5320 2243,5320 ; 2243,5312 2372,5312 ; 2372,4287 2372,4719 ; 2373,4720 2372,4719 ; v1(3053,5855) 3252,5855 ; v1(5471,4441) 5621,4441 5755,4575 5755,5052 5579.5,5227.5 ; 5505,5153 5579.5,5227.5 ; pad.GND_TEST_5@6038,6153 6038,6197 6020,6215 ; 7142,6010 7011,6010 6806,6215 6020,6215 ; 2372,4719 2372,5312 ; 2372,5312 2709,5312 3252,5855 ; 3252,5855 3450,5855 3450,6138 3509,6197 3916,6197 3940,6197 3965,6222 4105,6222 4251,6368 5527,6368 5680,6215 ; 5579.5,5227.5 5680,5328 5680,6215 ; 5680,6215 6020,6215
  Bottom Layer w100: 7142,823 7142,6010
GNDOSC: C19.1 C23.2 C27.2 C28.2 C30.2 L4.1 U1.34 | length 898.1
  Top Layer w8: C27.2@1851,2932.44 1851,2900 v1(1884,2867) 1938.44,2812.56 C23.2@1938.44,2811 ; C30.2@2086,2979.44 C28.2@2086,2931.56 2086.88,2932.44 C19.1@2155,2932.44 ; v1(2149,2888) 2149,2926.44 C19.1@2155,2932.44 ; U1.34@2321.77,2951.18 2173.74,2951.18 C19.1@2155,2932.44
  Top Layer w20: L4.1@1410.94,2815 v1(1539,2815)
  Bottom Layer w8: v1(1884,2867) 1905,2888 v1(2149,2888)
GNDPLL: C15.1 C17.1 C22.2 C26.2 C29.2 C31.2 L3.1 U1.30 U1.39 | length 1391.3
  Top Layer w8: v1(1809,3332) L3.1@1809,3394.06 ; v1(2068,3205) 2243.08,3029.92 U1.30@2321.77,3029.92 U1.30@2321.85,3030
  Top Layer w10: U1.39@2321.77,2852.76 2430.85,2852.76 2439.09,2861 v1(2594,2861)
  Top Layer w12: U1.30@2321.85,3030 v1(2420,3030) ; v1(2479,3027) 2609,3027 2673,2963 2673,2913.4 2618.67,2859.07 v1@2592.07,2859.07
  Bottom Layer w8: C15.1@2017,3243 2055,3205 v1(2068,3205) ; v1(2594,2861) 2602.56,2852.44 C17.1@2719,2852.44
  Bottom Layer w12: v1(2420,3030) 2423,3027 v1(2479,3027)
JTAG_NRST: P1.15 R67.1 SW_RESET.2 U3.1 | length 1992.5
  Top Layer w8: v1(4364,1005) 4364,523 v1(4485,402)
  Bottom Layer w8: P1.15@4310,1230 4364,1176 v1(4364,1005) ; v1(4485,402) 4568.47,402 R67.1@4570,400.47 4624.47,346 5174,346 U3.1@5232,404 5507.15,404 SW_RESET.2@5523.15,420
JTAG_NTRST: P1.3 P6.2 R12.1 U5.15 | length 2674
  Top Layer w8: P6.2@5319,2009 5516,1812 v1(5516,1249)
  Top Layer w10: U5.15@4838,2287 4910,2215 4910,1761.18 4906,1757.18 4906,1234 P1.3@4910,1230
  Bottom Layer w8: P1.3@4910,1230 4963,1177 5099,1177 5162,1240 5507,1240 v1(5516,1249)
  Bottom Layer w10: P1.3@4910,1230 R12.1@4910,1314.47
KEYPAD_D0: U1.4 U13.19 | length 1891.8
  Top Layer w8: v1(2184,3590) 2232.26,3541.73 U1.4@2321.77,3541.73
  Bottom Layer w8: U13.19@1680,5110 1854.94,4935.06 1854.94,4317.45 1848.63,4311.14 1848.63,3925.37 v1(2184,3590)
KEYPAD_D1: U1.5 U13.18 | length 1826.7
  Top Layer w8: v1(2157.84,3563.84) 2195.76,3525.91 2229.36,3525.91 2233.23,3522.05 U1.5@2321.77,3522.05
  Bottom Layer w8: U13.18@1680,5010 1835.26,4854.74 1835.26,4318.98 1833.63,4317.35 1833.63,3888.04 v1(2157.84,3563.84)
KEYPAD_D2: U1.6 U13.17 | length 1764.1
  Top Layer w8: v1(2131.67,3537.67) 2158.43,3510.91 2223.15,3510.91 2231.7,3502.36 U1.6@2321.77,3502.36
  Bottom Layer w8: U13.17@1680,4910 1815.57,4774.43 1815.57,3853.77 v1(2131.67,3537.67)
KEYPAD_D3: U1.9 U13.16 | length 1737.5
  Top Layer w8: v1(2089.91,3495.91) 2216.94,3495.91 2269.54,3443.31 U1.9@2321.77,3443.31
  Bottom Layer w8: U13.16@1680,4810 1756.52,4733.48 1756.52,3829.31 v1(2089.91,3495.91)
KEYPAD_D4: U1.10 U13.15 | length 1676.3
  Top Layer w8: v1(2063.75,3469.75) 2221.89,3469.75 2268.02,3423.62 U1.10@2321.77,3423.62
  Bottom Layer w8: U13.15@1680,4710 1736.83,4653.17 1736.83,3796.67 v1(2063.75,3469.75)
KEYPAD_RDY: U1.3 U13.13 | length 1247.7
  Top Layer w8: U13.13@1680,4510 1680,4495 v1(1874.63,4300.37) ; v1(2210.16,3616.16) 2264.9,3561.42 U1.3@2321.77,3561.42
  Bottom Layer w8: v1(1874.63,4300.37) 1874.63,3951.69 v1(2210.16,3616.16)
MICIN+: C62.1 J2.A J2.D R24.1 | length 850
  Top Layer w8: J2.D@1353.15,5993.15 1353.15,5792.44 R24.1@1437.56,5708.03 ; C62.1@1437.56,5630 R24.1@1437.56,5708.03 ; R24.1@1439.53,5710 R24.1@1437.56,5708.03
  Bottom Layer w8: J2.D@1353.15,5993.15 1420,6060 1680,6060 J2.A@1746.85,5993.15
MICIN-: C64.1 J2.E R33.2 | length 608.3
  Top Layer w8: J2.E@1550,6190 1540,6180 1540,6060 1500,6020 1500,5780.47 R33.2@1566.47,5714 C64.1@1566.47,5630.03
NBS1_3V3_BUF: U6.40 U8.5 | length 2308.7
  Top Layer w8: v1(3515,6107) 3515,6127.21 3542.79,6155 3724,6155 3814.02,6064.98 U6.40@3814.02,5950.08 ; U8.5@3587.8,4311.34 v1(3587.8,4632.2)
  Bottom Layer w8: v1(3515,6107) 3521,6101 3521,6013.23 3530,6004.23 3530,4690 v1(3587.8,4632.2)
NCS0: U1.166 U8.36 | length 398.1
  Top Layer w10: U1.166@3245.98,3698.23 3245.98,3751.98 3430.32,3936.31 U8.36@3430.32,4020
NCS1: U1.167 U8.35 | length 399.1
  Top Layer w8: 3409.02,3939.06 3410.63,3940.67 U8.35@3410.63,4020
  Top Layer w10: U1.167@3226.3,3698.23 3228.08,3700.01 3228.08,3745.85 3226.91,3747.01 3226.91,3756.96 3409.02,3939.06
NCS2: U1.168 U8.33 | length 390
  Top Layer w10: U1.168@3206.61,3698.23 3206.61,3760.7 3371.26,3925.34 U8.33@3371.26,4020
NCS3: U1.169 U8.32 | length 390
  Top Layer w10: U1.169@3186.93,3698.23 3186.93,3765.06 3349.8,3927.92 3349.8,4018.22 U8.32@3351.58,4020
NCS3V3B0: P8.1 U8.13 | length 533.2
  Top Layer w10: P8.1@3430,4810 3471.53,4768.47 3471.53,4673 3454.46,4655.94 3454.46,4465.69 3430,4441.23 3430,4311.65 U8.13@3430.32,4311.34
NCS3V3B1: P8.2 U6.6 U8.14 | length 1698.1
  Top Layer w8: 3722,5268 3650,5340 3650,5512 3702,5564 3803,5564 3845.52,5521.48 U6.6@3845.52,5460
  Top Layer w10: U8.14@3410.63,4311.34 3410.63,4447.57 3420.44,4457.38 3420.44,4479.74 3410.63,4489.55 3410.63,4690.63 P8.2@3430,4710 3388.47,4751.53 3388.47,4876.66 3722,5210.18 3722,5268
NCS3V3B2: P6.1 P8.3 U5.25 U8.16 U18.25 U18.48 | length 7852.6
  Top Layer w8: P8.3@3330,4810 3330,4946 3617,5233 v1(3693,5233) ; v1(3704,5137) 3936,5137 v1(3958,5159) ; v1(4130,5061) 4566,4625 U18.25@5201.58,4625 5197,4620.42 5197,4513 5233,4477 5485.91,4477 5504.91,4458 5559,4458 5654.33,4553.33 U18.48@5654.33,4625 ; U5.25@4438,2387 4479,2346 4882,2346 P6.1@5219,2009
  Top Layer w10: P8.3@3330,4810 3371.47,4768.53 3371.47,4744.49 3375,4740.96 3375,4406.23 3378,4403.23 3378,4366.77 3371.26,4360.03 U8.16@3371.26,4311.34
  Bottom Layer w8: v1(3366,4456) 3396,4486 3615.23,4486 3638.23,4463 3659.77,4463 3684.77,4488 3847.77,4488 3849.77,4486 3987.79,4486 4000.44,4473.34 4021.98,4473.34 4023.64,4475 4056.36,4475 4058.02,4473.34 4104.41,4473.34 4106.07,4475 4204.23,4475 4213.23,4484 4234.77,4484 4243.77,4475 4341,4475 4499,4317 4499,2660 4389,2550 4389,2436 U5.25@4438,2387 ; v1(3693,5233) 3704,5222 v1(3704,5137) ; v1(3958,5159) 4032,5159 v1(4130,5061)
NCS3V3B3: P8.4 U8.17 | length 436.2
  Top Layer w10: P8.4@3330,4710 3358,4682 3358,4483 3354.82,4483 3339,4467.18 3339,4444.82 3354.82,4429 3358,4429 3358,4399.18 3361,4396.18 3361,4373.82 3350,4362.82 3350,4312.91 U8.17@3351.58,4311.34
NCS3V3B4: P8.5 U8.19 | length 537.7
  Top Layer w10: P8.5@3230,4810 3288.47,4751.53 3288.47,4691.27 3308,4671.74 3308,4487.96 3313,4482.96 3313,4412.77 3307,4406.77 3307,4371.82 3310.43,4368.39 3310.43,4313.12 U8.19@3312.21,4311.34
NCS3V3B5: P8.6 U8.20 | length 430.2
  Top Layer w10: P8.6@3230,4710 3230,4625 3290.74,4564.26 3290.74,4447.44 3296,4442.18 3296,4419.82 3289.22,4413.04 3289.22,4359.78 3292.52,4356.48 U8.20@3292.52,4311.34
NCS3V3B6: P8.7 U8.22 | length 549.7
  Top Layer w10: P8.7@3130,4810 3130,4768.73 3171.53,4727.2 3171.53,4638.47 3242,4568 3242,4419.23 3253.15,4408.08 U8.22@3253.15,4311.34
NCS3V3B7: P8.8 U7.22 U8.23 | length 2599.7
  Top Layer w8: P8.8@3130,4710 3124.53,4704.53 3086,4743.06 3086,4824 3547,5285 v1(3668,5285) ; v1(3760,5225) 3786,5199 v1(3994,5199) ; v1(4396,5304) 4396,5303 4395,5302 v1(4530,5302)
  Top Layer w10: P8.8@3124.53,4704.53 3124.53,4661.43 3225,4560.96 3225,4412.18 3236,4401.18 3236,4378.82 3233.47,4376.28 U8.23@3233.47,4311.34
  Bottom Layer w8: v1(3668,5285) 3700,5285 v1(3760,5225) ; v1(3994,5199) 4280.23,5199 4374.23,5293 4385,5293 v1(4396,5304) ; v1(4530,5302) 4530,5414 U7.22@4662,5546
NCS4: U1.11 U8.30 | length 1933.4
  Top Layer w10: U1.11@2321.77,3403.94 2091.38,3403.94 2036.75,3458.57 2036.75,3564.75 2220,3748 2401.34,3748 2426.4,3773.06 2565.24,3773.06 v1(2571,3778.81) ; v1(3096,3777.63) 3116.59,3777.63 3120,3781.04 3120,3790.18 3135.82,3806 3182.23,3806 3312.21,3935.98 U8.30@3312.21,4020
  Bottom Layer w10: v1(2571,3778.81) 3094.81,3778.81 v1(3096,3777.63)
NCS5: U1.12 U8.29 | length 1958.6
  Top Layer w10: U1.12@2321.77,3384.25 2233.71,3384.25 2231.02,3386.94 2084.34,3386.94 2019.75,3451.53 2019.75,3571.79 2212.96,3765 2301.96,3765 2304.64,3767.69 2396.99,3767.69 2419.36,3790.06 2529.91,3790.06 2555.67,3815.82 v1(2571,3815.82) ; v1(3096,3814.63) 3120.4,3814.63 3128.77,3823 3175.18,3823 3292.52,3940.34 U8.29@3292.52,4020
  Bottom Layer w10: v1(2571,3815.82) 2573.82,3813 3092,3813 3094.82,3815.82 v1(3096,3814.63)
NCS6: U1.13 U8.27 | length 1970.3
  Top Layer w10: U1.13@2321.77,3364.57 2218.38,3364.57 2213.01,3369.94 2077.3,3369.94 2002.75,3444.48 2002.75,3578.83 2205.92,3782 2283.94,3782 2309,3807.06 2522.87,3807.06 v1(2571,3855.19) ; v1(3096,3854) 3133.91,3854 3227,3947.09 3227,3951.18 3248.82,3973 3252.91,3973 3253.15,3973.24 U8.27@3253.15,4020
  Bottom Layer w10: v1(2571,3855.19) 2596.19,3830 2916.23,3830 2940.23,3854 v1(3096,3854)
NCS7: U1.14 U8.26 | length 2013.3
  Top Layer w10: U1.14@2321.77,3344.88 2214.02,3344.88 2205.96,3352.94 2070.26,3352.94 1985.75,3437.44 1985.75,3585.88 2198.88,3799 2276.9,3799 2304.64,3826.74 2505.56,3826.74 2544,3865.19 2544,3866.37 2569.82,3892.19 v1(2571,3892.19) ; v1(3096,3891) 3146.87,3891 3210,3954.13 3210,3959.4 3233.47,3982.87 U8.26@3233.47,4020
  Bottom Layer w10: v1(2571,3892.19) 2579.19,3884 2849.82,3884 2886.82,3847 2909.18,3847 2946.18,3884 3089,3884 v1(3096,3891)
NetC22_1: C22.1 R1.2 U1.29 | length 558.8
  Top Layer w8: v1(2116,3242) 2116,3180 2246.39,3049.61 U1.29@2321.77,3049.61
  Bottom Layer w8: R1.2@1959.53,3229 1963.23,3232.71 1963.23,3262 ; C22.1@1963.23,3297 1963.23,3262 ; v1(2116,3242) 2088.25,3269.75 1970.98,3269.75 1963.23,3262
NetC23_1: C23.1 U1.32 X1.2 | length 960.9
  Top Layer w8: X1.2@1777.76,2658.24 1840.79,2658.24 C23.1@1993.56,2811 1925,2879.56 1925,3014 1978,3067 2130,3067 2206.45,2990.55 U1.32@2321.77,2990.55
NetC26_1: C26.1 R1.1 | length 55.8
  Bottom Layer w8: C26.1@1849,3239.44 1890.03,3239.44 R1.1@1900.47,3229
NetC27_1: C27.1 U1.31 X1.1 | length 829
  Top Layer w8: X1.1@1642,2794 1835.56,2987.56 C27.1@1851,2987.56 1945.44,3082 2136.21,3082 2208.21,3010 2321.54,3010 U1.31@2321.77,3010.24
NetC28_1: C28.1 U1.36 X2.2 | length 432.8
  Top Layer w8: X2.2@1990,2940 2053.56,2876.44 C28.1@2086,2876.44 2099.72,2876.44 2099.72,2866.07 2131.79,2834 2144.21,2834 2157.21,2847 2165.98,2847 2198.72,2879.73 2198.72,2911.81 U1.36@2321.77,2911.81
NetC29_1: C29.1 R2.2 U1.38 | length 546.1
  Top Layer w8: U1.38@2321.77,2872.44 2323.4,2874.07 2408.02,2874.07 2408.46,2873.63 2429.09,2873.63 2432.46,2877 2564,2877 2581,2894 v1(2614,2894)
  Bottom Layer w8: v1(2614,2894) 2627.19,2880.81 2769.28,2880.81 2771.47,2883 ; R2.2@2771.47,2927.53 R2.2@2771.47,2915 2771.47,2883 ; C29.1@2774.44,2848 2771.47,2850.97 2771.47,2883
NetC30_1: C30.1 U1.35 X2.1 | length 614.4
  Top Layer w8: X2.1@1990,2983 2041.56,3034.56 C30.1@2086,3034.56 2046,2994.56 2046,2922.54 2065.35,2903.19 2108.27,2903.19 2114.72,2896.75 2114.72,2872.28 2127.95,2872.28 2138.23,2862 2159.77,2862 2183.72,2885.95 2183.72,2927.82 2187.39,2931.5 U1.35@2321.77,2931.5
NetC31_1: C31.1 R2.1 | length 53.7
  Bottom Layer w8: R2.1@2830.53,2915 2876.56,2915 C31.1@2882,2909.56
NetC39_1: C39.1 DISP1.10 | length 62.3
  Bottom Layer w10: C39.1@852.56,4100 852.56,4154.56 DISP1.10@858,4160
NetC40_1: C40.1 DISP1.8 | length 68.5
  Bottom Layer w10: C40.1@967.56,4095 967.56,4151.45 DISP1.8@976.11,4160
NetC40_2: C40.2 DISP1.9 | length 66.9
  Bottom Layer w10: C40.2@912.44,4095 912.44,4155.38 DISP1.9@917.06,4160
NetC41_1: C41.1 U13.7 | length 129.4
  Bottom Layer w12: U13.7@1380,4610 1383.44,4606.56 C41.1@1508,4606.56
NetC42_1: C42.1 DISP1.6 | length 94
  Bottom Layer w10: C42.1@1072.56,4075 1072.56,4138.34 DISP1.6@1094.22,4160
NetC42_2: C42.2 DISP1.7 | length 92.3
  Bottom Layer w10: C42.2@1017.44,4075 1017.44,4142.27 DISP1.7@1035.17,4160
NetC43_1: C43.1 U13.6 | length 233.8
  Bottom Layer w8: U13.6@1380,4710 1467.56,4710 C43.1@1571,4606.56
NetC44_2: C44.2 DISP1.1 | length 83
  Bottom Layer w10: DISP1.1@1389.5,4160 1415,4134.5 C44.2@1415,4087.56
NetC45_2: C45.2 DISP1.2 | length 72.6
  Bottom Layer w10: C45.2@1330,4087.56 1330,4159.56 DISP1.2@1330.44,4160
NetC46_2: C46.2 DISP1.3 | length 77.2
  Bottom Layer w10: C46.2@1260,4087.56 1260,4148.61 DISP1.3@1271.39,4160
NetC47_2: C47.2 DISP1.4 | length 72.5
  Bottom Layer w10: C47.2@1200,4092.56 1200,4147.67 DISP1.4@1212.33,4160
NetC48_2: C48.2 DISP1.5 | length 75
  Bottom Layer w10: C48.2@1135,4092.56 1135,4141.72 DISP1.5@1153.28,4160
NetC59_1: C59.1 U16.34 X3.2 | length 629.8
  Top Layer w8: U16.34@2909.64,1437.73 2911.37,1436 2976.02,1436 2979.38,1439.36 3013.34,1439.36 3016.71,1436 3150,1436 X3.2@3327,1613
  Bottom Layer w8: X3.2@3327,1613 3328.44,1611.56 C59.1@3462,1611.56
NetC60_1: C60.1 U16.33 X3.1 | length 560.6
  Top Layer w8: U16.33@2909.64,1418.05 2912.59,1421 2982.23,1421 2985.59,1424.36 3007.13,1424.36 3010.49,1421 X3.1@3327,1421
  Bottom Layer w8: X3.1@3327,1421 3441.56,1421 C60.1@3459,1438.44
NetC61_1: C61.1 C63.1 C65.1 C66.1 U16.18 U16.23 U16.37 | length 1104.5
  Top Layer w8: U16.18@2722.63,1191.67 2722.63,1234.23 2716.31,1240.54 2716.31,1263.31 2716.31,1268.08 2735.23,1287 2791.77,1287 2815.77,1263 v2(2821,1263)
  Top Layer w10: v1(2653,1315) v1(2653,1423) ; v2(2699.69,1263.31) 2716.31,1263.31 ; v1(2707,1436) 2744,1473 v2(2828,1473) 2828,1504.41 2837.97,1514.38 2837.97,1526.72 2849,1537.74 U16.37@2840.74,1546 ; v2(2821,1263) 2821.05,1262.95 U16.23@2821.05,1191.67 2821.05,1155.95 2829,1148 C61.1@3010.85,1148 3018,1155.15 C63.1@3018,1226
  Bottom Layer w10: v1(2653,1315) 2653,1310 v2(2699.69,1263.31) ; v1(2653,1423) 2694,1423 v1(2707,1436) ; C65.1@2824,1433.56 2833.22,1442.78 2828,1448 v2(2828,1473)
NetC62_2: C62.2 R26.1 | length 64.8
  Top Layer w8: R26.1@1380.47,5566 1380.47,5628.03 C62.2@1382.44,5630
NetC64_2: C64.2 R32.1 | length 92.6
  Top Layer w8: C64.2@1621.56,5630 1621.56,5539.5 R32.1@1623.06,5538
NetDISP1_13: DISP1.13 U11.11 | length 722.5
  Top Layer w10: v1(854,4739) 856.39,4736.61 U11.11@856.39,4668.17
  Bottom Layer w10: DISP1.13@680.83,4160 680.83,4192.83 854,4366 v1(854,4739)
NetDISP1_14: DISP1.14 U11.13 | length 728.7
  Top Layer w10: U11.13@805.2,4668.17 v1(805.2,4736.8)
  Bottom Layer w10: DISP1.14@621.78,4160 814,4352.22 814,4568.18 805.2,4576.98 v1(805.2,4736.8)
NetDISP1_15: DISP1.15 U9.4 | length 516.8
  Top Layer w8: U9.4@546.8,4670.17 547,4669.97 v1(547,4569)
  Bottom Layer w8: v1(547,4569) 547,4239 562.72,4223.28 DISP1.15@562.72,4160
NetDISP1_16: DISP1.16 U9.5 | length 517.4
  Top Layer w8: v1(520,4595) 520,4668.97 U9.5@521.2,4670.17
  Bottom Layer w8: DISP1.16@503.67,4160 520,4176.33 v1(520,4595)
NetDISP1_17: DISP1.17 U9.11 | length 303
  Top Layer w10: DISP1.17@444.61,4160 444.61,4331.61 495.61,4382.61 U9.11@495.61,4441.83
NetDISP1_19: DISP1.19 Q2.D | length 231.7
  Top Layer w10: Q2.D@224,4310 235.95,4298.05 DISP1.19@235.95,4083.23
NetJ1_1: J1.1 R41.1 U16.17 | length 785.1
  Top Layer w8: U16.17@2702.94,1191.67 2702.94,972.06 J1.1@2880,795 3181,795 R41.1@3191,805
NetJ1_3: J1.3 R42.1 U16.16 | length 909.5
  Top Layer w8: U16.16@2683.26,1191.67 2683.26,1102.74 2687.94,1098.06 2687.94,965.84 2764,889.79 2764,811 J1.3@2780,795 ; v1(2862,872) 3038.47,872 3080.47,830 3161,830 R42.1@3191,860
  Bottom Layer w8: J1.3@2780,795 2857,872 v1(2862,872)
NetJ1_4: J1.4 R43.1 U16.14 | length 715.6
  Top Layer w8: U16.14@2643.89,1191.67 2643.89,1103.11 2672.94,1074.06 2672.94,959.63 2730,902.57 J1.4@2730,695
  Bottom Layer w8: J1.4@2730,695 2785,640 R43.1@2785,534.53
NetJ1_6: J1.6 R44.1 U16.13 | length 682.3
  Top Layer w8: U16.13@2624.2,1191.67 2624.2,1100.8 2645,1080 2645,961 2630,946 J1.6@2630,695
  Bottom Layer w8: J1.6@2630,695 2655,670 R44.1@2655,534.53
NetJ1_9: J1.9 R21.2 | length 3195.7
  Top Layer w8: v1(2248.53,1151) R21.2@2290.53,1193 ; J1.9@2920,985 2921.85,986.85 3282.15,986.85 v1(3357,912)
  Bottom Layer w8: v1(2248.53,1151) 2147,1049.47 2147,260 2191,216 3033,216 3357,540 v1(3357,912)
NetJ1_10: J1.10 R20.2 U16.26 | length 4561.8
  Top Layer w8: v1(2285.53,1326.53) R20.2@2285.53,1376 ; J1.10@2820,985 2869,1034 2955,1034 2984,1005 3292,1005 3328,969 3354,969 v1(3391,932) ; U16.26@2909.64,1280.25 v1(2964.25,1280.25) ; v1(3060,1279) 3077.79,1279 3178.79,1178 3454,1178 3469,1163 v1(3469,946)
  Bottom Layer w8: v1(2285.53,1326.53) 2122,1163 2122,241 2162,201 3050,201 3391,542 v1(3391,932) 3455,932 v1(3469,946) ; v1(2964.25,1280.25) 2965.5,1279 v1(3060,1279)
NetJ1_11: J1.11 R18.2 U16.28 | length 3868.3
  Top Layer w8: v1(2222,945) 2222,387 2311,298 2992,298 v1(3482,788) ; R18.2@2285.53,1099 2476,1099 J1.11@2590,985 2547.98,985 2506.98,944 2304,944 v1(2304,945) ; U16.28@2909.64,1319.62 2913.26,1316 v1(2989,1316) ; v1(3062,1316) 3185,1193 3479,1193 3536,1136 v1(3536,842)
  Bottom Layer w8: v1(2222,945) v1(2304,945) ; v1(2989,1316) v1(3062,1316) ; v1(3482,788) v1(3536,842)
NetJ1_12: J1.12 R22.2 | length 214.5
  Top Layer w8: R22.2@2287.53,1014 2461,1014 J1.12@2490,985
NetJTAG_SEL_1: JTAG_SEL.1 R6.1 | length 108.6
  Top Layer w12: R6.1@3714,792.94 3714,690 JTAG_SEL.1@3718,686
NetJTAG_SEL_2: JTAG_SEL.2 U1.105 | length 2188.5
  Top Layer w10: U1.105@3520.59,2596.85 3573.82,2596.85 3573.82,2497 3527,2450.18 3527,1670.54 3920,1277.54 3920,985 v1(3836.16,901.16)
  Bottom Layer w10: JTAG_SEL.2@3818,686 3818,883 v1(3836.16,901.16)
NetJTAG_SEL_3: JTAG_SEL.3 R5.1 | length 98.3
  Top Layer w12: JTAG_SEL.3@3918,686 3926,694 R5.1@3926,780.94
NetK1_1: K1.1 U13.12 | length 2094.5
  Top Layer w8: v1(1241,4698) 1241,4677 v1(1324,4594)
  Bottom Layer w8: K1.1@467,5861 580,5748 580,5290.23 1130.23,4740 1199,4740 v1(1241,4698) ; v1(1324,4594) 1345.09,4594 1365.09,4574 1423,4574 1587,4410 U13.12@1680,4410
NetK1_2: K1.2 U13.11 | length 2039.9
  Top Layer w8: v1(1199,4688) 1199,4682.23 1335.23,4546 v1(1336,4546)
  Bottom Layer w8: K1.2@467,5761 565,5663 565,5284.02 1124.02,4725 1162.77,4725 1188,4699.77 1188,4699 v1(1199,4688) ; v1(1336,4546) 1429.79,4546 1580.79,4395 1595,4395 U13.11@1680,4310
NetK1_3: K1.3 U13.9 | length 1689.2
  Top Layer w8: v1(1122,4684) 1380,4426 U13.9@1380,4410
  Bottom Layer w8: K1.3@467,5661 415,5609 415,5555.02 450.02,5520 479,5520 517,5482 517,5289 v1(1122,4684)
NetK1_4: K1.4 U13.8 | length 1469
  Top Layer w8: v1(1162,4689) 1162,4683.23 1335.23,4510 U13.8@1380,4510
  Bottom Layer w8: K1.4@467,5561 532,5496 532,5295.8 1117.8,4710 1141,4710 v1(1162,4689)
NetK1_5: K1.5 U13.2 | length 1058.4
  Top Layer w8: K1.5@467,5461 717,5461 1068,5110 U13.2@1380,5110
NetK1_6: K1.6 U13.3 | length 1058.4
  Top Layer w8: K1.6@467,5361 723,5361 1074,5010 U13.3@1380,5010
NetK1_7: K1.7 U13.4 | length 1058.4
  Top Layer w8: K1.7@467,5261 645,5261 996,4910 U13.4@1380,4910
NetK1_8: K1.8 U13.5 | length 1058.4
  Top Layer w8: K1.8@467,5161 548,5161 890,4819 1169.91,4819 1178.91,4810 U13.5@1380,4810
NetL5_A: L5.A R68.1 | length 170.5
  Top Layer w8: R68.1@1221,310.53 1221,473.94 L5.A@1226,478.94
NetL6_A: L6.A R69.1 | length 98.4
  Top Layer w10: R69.1@491,2963.53 567.47,2963.53 L6.A@583,2948
NetL7_A: L7.A R70.1 | length 128.2
  Top Layer w10: R70.1@448,2238.47 551.42,2238.47 L7.A@568.94,2256
NetP1_11: P1.11 R8.1 | length 81.3
  Bottom Layer w10: P1.11@4510,1230 4512,1232 R8.1@4512,1310.47
NetP1_17: P1.17 R13.1 | length 108.4
  Bottom Layer w8: P1.17@4210,1230 4212,1232 4212,1255.53 4214.69,1255.53 4223.47,1264.31 4223.47,1276.74 4212,1288.21 R13.1@4212,1326.47
NetP1_19: P1.19 R14.1 | length 96.5
  Bottom Layer w8: P1.19@4110,1230 R14.1@4110,1326.47
NetP2_1: P2.1 U5.14 | length 872.9
  Top Layer w8: P2.1@3955,2080 4002,2127 4039.23,2127 4058.23,2108 4079.77,2108 4094.78,2123.01 4165.22,2123.01 4172.23,2116 4193.77,2116 4226.77,2149 4271.02,2149 4274.02,2152 4307.98,2152 4310.98,2149 4343.67,2149 4351.67,2141 4505.02,2141 4509.02,2145 4542.98,2145 4546.98,2141 4571.77,2141 4585.77,2127 4678,2127 U5.14@4738,2187
NetP2_2: P2.2 U5.24 | length 1014.5
  Top Layer w8: P2.2@3955,1980 3918,2017 3906.79,2017 3876,2047.79 3876,2295.77 4039.23,2459 4060.77,2459 4070.77,2449 4298.63,2449 4310.63,2437 4388,2437 U5.24@4438,2487
NetP2_3: P2.3 U5.36 | length 390.9
  Top Layer w8: P2.3@3955,1880 3955,1912 4067,2024 4175,2024 4191,2040 4191,2045.77 4232.23,2087 U5.36@4238,2087
NetP2_4: P2.4 U5.33 | length 492.2
  Top Layer w8: v1(4069,2134) 4122,2187 U5.33@4138,2187
  Bottom Layer w8: P2.4@3955,1780 4033,1858 4033,2098 v1(4069,2134)
NetP3_2: P3.2 U5.13 | length 1761.5
  Top Layer w8: P3.2@3785,1890 3867,1808 3867,1698 3918,1647 4783,1647 4881,1745 4881,2144 U5.13@4838,2187
NetP5_2: P5.2 U5.30 | length 2111.3
  Top Layer w8: v1(5300,2090) 5383,2090 P5.2@5738,1735
  Bottom Layer w8: U5.30@4238,2387 4272,2353 4272,2326 4296,2302 4325,2302 4338,2315 4429,2315 4474,2360 4474,2488 4509,2523 4561,2523 4586,2498 4586,2467 4602,2451 4632,2451 4674,2409 4674,2325 4676,2323 5055,2323 5288,2090 v1(5300,2090)
NetP5_4: P5.4 U5.31 | length 3748.9
  Top Layer w8: v1(3787,2266) 3744,2223 3744,1858 3771.47,1830.53 3801.79,1830.53 3847,1785.32 3847,1677 3896,1628 4066,1628 v1(4352,1342)
  Bottom Layer w8: v1(3787,2266) 4117,2266 U5.31@4138,2287 ; v1(4352,1342) 4369.47,1324.53 4369.47,1213.21 4402.68,1180 4810,1180 4819.47,1170.53 4926.79,1170.53 4956,1141.32 4956,1112 4979,1089 5069,1089 5188,1208 5542,1208 5542,1626 5592,1676 5697,1676 P5.4@5738,1635
NetP5_6: P5.6 U5.32 | length 2955.9
  Top Layer w8: v1(4443,2741) v1(4551,2633)
  Bottom Layer w8: U5.32@4238,2287 4202,2323 4202,2590 4305,2693 4395,2693 v1(4443,2741) ; v1(4551,2633) 5003,2633 5625,2011 5874,2011 5909,1976 5909,1897 5957,1849 5957,1754 P5.6@5738,1535
NetP5_8: P5.8 U5.37 | length 2882.3
  Top Layer w8: U5.37@4138,1987 4168,1987 4188,1967 4188,1880 4228,1840 4250,1840 4274,1816 4274,1784 4308,1750 v1(4606,1750) ; v1(4968,1511) 4982,1497 4982,1419 4968,1405 4968,1196 4984,1180 5017.32,1180 5101,1096.32 v1(5101,1042.63)
  Bottom Layer w8: v1(4606,1750) 4641,1715 4641,1537.21 4667.21,1511 v1(4968,1511) ; v1(5101,1042.63) 5140.6,1042.63 5287.23,896 5419.8,896 5603.28,1079.47 5661,1079.47 5697.47,1115.94 5697.47,1151.79 5721.21,1175.53 5735.84,1175.53 5779,1218.69 5779,1394 P5.8@5738,1435
NetP5_10: P5.10 U5.38 | length 2587.6
  Top Layer w8: U5.38@4238,1987 4302,1923 4352.91,1923 4384,1891.91 4384,1873 4408,1849 4581,1849 4592,1860 4592,1912 4609,1929 4632,1929 4674,1971 v1(4674,2038) ; v1(4964.17,2127) v1(5124.17,1967) ; v1(5517.34,1881) 5590,1808.34 5590,1694 5608,1676 5759,1676 5779,1656 5779,1376 P5.10@5738,1335
  Bottom Layer w8: v1(4674,2038) 4754,2038 4788,2072 4788,2091 4824,2127 v1(4964.17,2127) ; v1(5124.17,1967) 5124.17,1816 5172.44,1767.73 5404.07,1767.73 v1(5517.34,1881)
NetP5_12: P5.12 U5.39 | length 2593.7
  Top Layer w8: U5.39@4138,1887 4164,1861 4164,1745 4216,1693 4417,1693 v1(4429,1681) ; v1(4956,1445) 4942,1459 4942,1528 4951,1537 5012.47,1537 5163.47,1386 5163.47,1097.74 5180,1081.21 v1(5180,1040)
  Bottom Layer w8: v1(4429,1681) 4611,1499 4611,1471.5 4637.5,1445 v1(4956,1445) ; v1(5180,1040) 5309,911 5413.59,911 5597.06,1094.47 5654.79,1094.47 5682.47,1122.16 5682.47,1179.47 P5.12@5738,1235
NetP5_14: P5.14 U5.40 | length 2814
  Top Layer w8: U5.40@4238,1787 4238,1749 4264,1723 4519,1723 v1(4520,1722) ; v1(4951,1034) 4951,1271 4924,1298 4924,1557 4951,1584 v1(4983,1584)
  Bottom Layer w8: v1(4520,1722) 4626,1616 4626,1496 4635.5,1486.5 4647.5,1486.5 4662,1472 4970,1472 4994,1496 4994,1573 v1(4983,1584) ; v1(4951,1034) 4988,997 5163,997 5316,844 5432.21,844 5532,943.79 5532,965.77 5547.23,981 5568.77,981 5570.3,979.47 5742.47,979.47 5779,1016 5779,1094 P5.14@5738,1135
NetP5_16: P5.16 U5.41 | length 2437.8
  Top Layer w8: U5.41@4238,1887 4298,1827 4573,1827 v1(4577,1823) ; v1(4963,1616) 5046,1616 5112,1550 5240,1550 5240,1545.31 5259.53,1525.79 5259.53,1492.21 5235.79,1468.47 5221.16,1468.47 5178.47,1425.79 5178.47,1292.21 5206,1264.69 5206,984 5320,870 v1(5370,870)
  Bottom Layer w8: v1(4577,1823) 4664,1823 4674,1813 4674,1784 4713,1745 4800.79,1745 4929.79,1616 v1(4963,1616) ; v1(5370,870) 5415.02,870 5541.02,996 5619.69,996 5621.21,994.47 5654.79,994.47 5678.53,1018.21 5678.53,1022.94 5690.59,1035 P5.16@5738,1035
NetQ1_1: Q1.1 R67.2 | length 67.1
  Bottom Layer w8: R67.2@4570,459.53 4572.4,461.93 Q1.1@4572.4,525.63
NetQ1_3: Q1.3 R57.2 | length 88.2
  Bottom Layer w8: Q1.3@4535,604.37 4540,609.37 R57.2@4540,690.47
NetR16_1: R16.1 U1.71 U15.5 | length 1514.6
  Top Layer w8: R16.1@1709.53,2126 1812,2126 U15.5@1814,2124 1848,2090 v1(2299,2090) ; v1(2299,2220) v1(2411,2332) ; U1.71@2773.54,2499.41 2773.54,2441.46 2803,2412 v1(2805,2412)
  Bottom Layer w8: v1(2299,2090) v1(2299,2220) ; v1(2411,2332) 2411,2405 2478.69,2472.69 2742.31,2472.69 2803,2412 v1(2805,2412)
NetR17_1: R17.1 U1.72 U15.6 | length 1542.1
  Top Layer w8: R17.1@1707.53,2026 1812,2026 U15.6@1814,2024 ; v1(2166,2149) v1(2383,2366) ; U1.72@2793.23,2499.41 2796.01,2496.63 2796.01,2440.3 2796.13,2440.18 2832.82,2440.18 v1(2859,2414)
  Bottom Layer w8: U15.6@1814,2024 1939,2024 2070,2155 2160,2155 v1(2166,2149) ; v1(2383,2366) 2383,2414 2456.69,2487.69 2785.31,2487.69 v1(2859,2414)
NetR19_2: R19.2 U16.27 | length 668.2
  Top Layer w8: R19.2@2289.53,1278 2448,1278 2493,1233 2589.23,1233 2642.23,1286 2660.77,1286 2676.77,1302 2797.98,1302 2799.98,1300 2909.57,1300 U16.27@2909.64,1299.94
NetR25_1: R25.1 R32.2 U17.10 | length 519.8
  Top Layer w8: R25.1@1562.47,5452 1564,5453.53 1564,5495.76 ; R32.2@1564,5538 1564,5495.76 ; U17.10@1920.82,5680 1841,5680 1656.76,5495.76 1564,5495.76
NetR25_2: R25.2 U17.9 | length 441.3
  Top Layer w8: R25.2@1621.53,5452 1756,5452 1946.41,5642.41 U17.9@1946.41,5680
NetR26_2: R26.2 R31.1 U17.11 | length 695.8
  Top Layer w8: R31.1@1376.47,5488 1376.47,5502.94 R26.2@1439.53,5566 1502,5503.53 1502,5452 1545,5409 1884.07,5409 U17.11@1920.82,5445.75
NetR28_2: R28.2 U16.21 | length 665.1
  Top Layer w8: U16.21@2781.68,1191.67 2781.68,1142.32 2820.46,1103.54 3327.01,1103.54 R28.2@3365.47,1142
NetR29_2: R29.2 U16.20 | length 692
  Top Layer w10: U16.20@2762,1191.67 2762,1120 2794.46,1087.54 3353.94,1087.54 R29.2@3364.47,1077
NetR31_2: R31.2 U17.12 | length 635.7
  Top Layer w8: R31.2@1435.53,5488 1435.53,5453.47 1505,5384 1946,5384 1946.41,5384.41 U17.12@1946.41,5445.75
NetR40_1: R40.1 U16.24 | length 64.5
  Top Layer w8: U16.24@2840.74,1191.67 v1(2873.67,1191.67)
  Bottom Layer w8: v1(2873.67,1191.67) 2890,1208 2890,1204.47 R40.1@2893.47,1201
NetR47_1: R47.1 R48.2 REG_1V8.1 | length 192.6
  Top Layer w30: REG_1V8.1@841,964 871,994 R47.1@946,994 946.47,993.53 R48.2@946.47,919
NetR49_1: R49.1 R50.2 REG_5V.1 | length 179.7
  Top Layer w12: REG_5V.1@839,2783 REG_5V.1@854,2768
  Top Layer w30: REG_5V.1@854,2768 R50.2@946.47,2768 R49.1@946.47,2834